# Altium PCB PCB1.PcbDoc
Units mil, origin at the board's own origin, x right, y up, seen from the top; angles counter-clockwise.
Board outline 2637.8 x 1692.91 mil, 2 copper layers (Top Layer, Bottom Layer); 41 components, 52 nets, 192 pads, 46 vias.
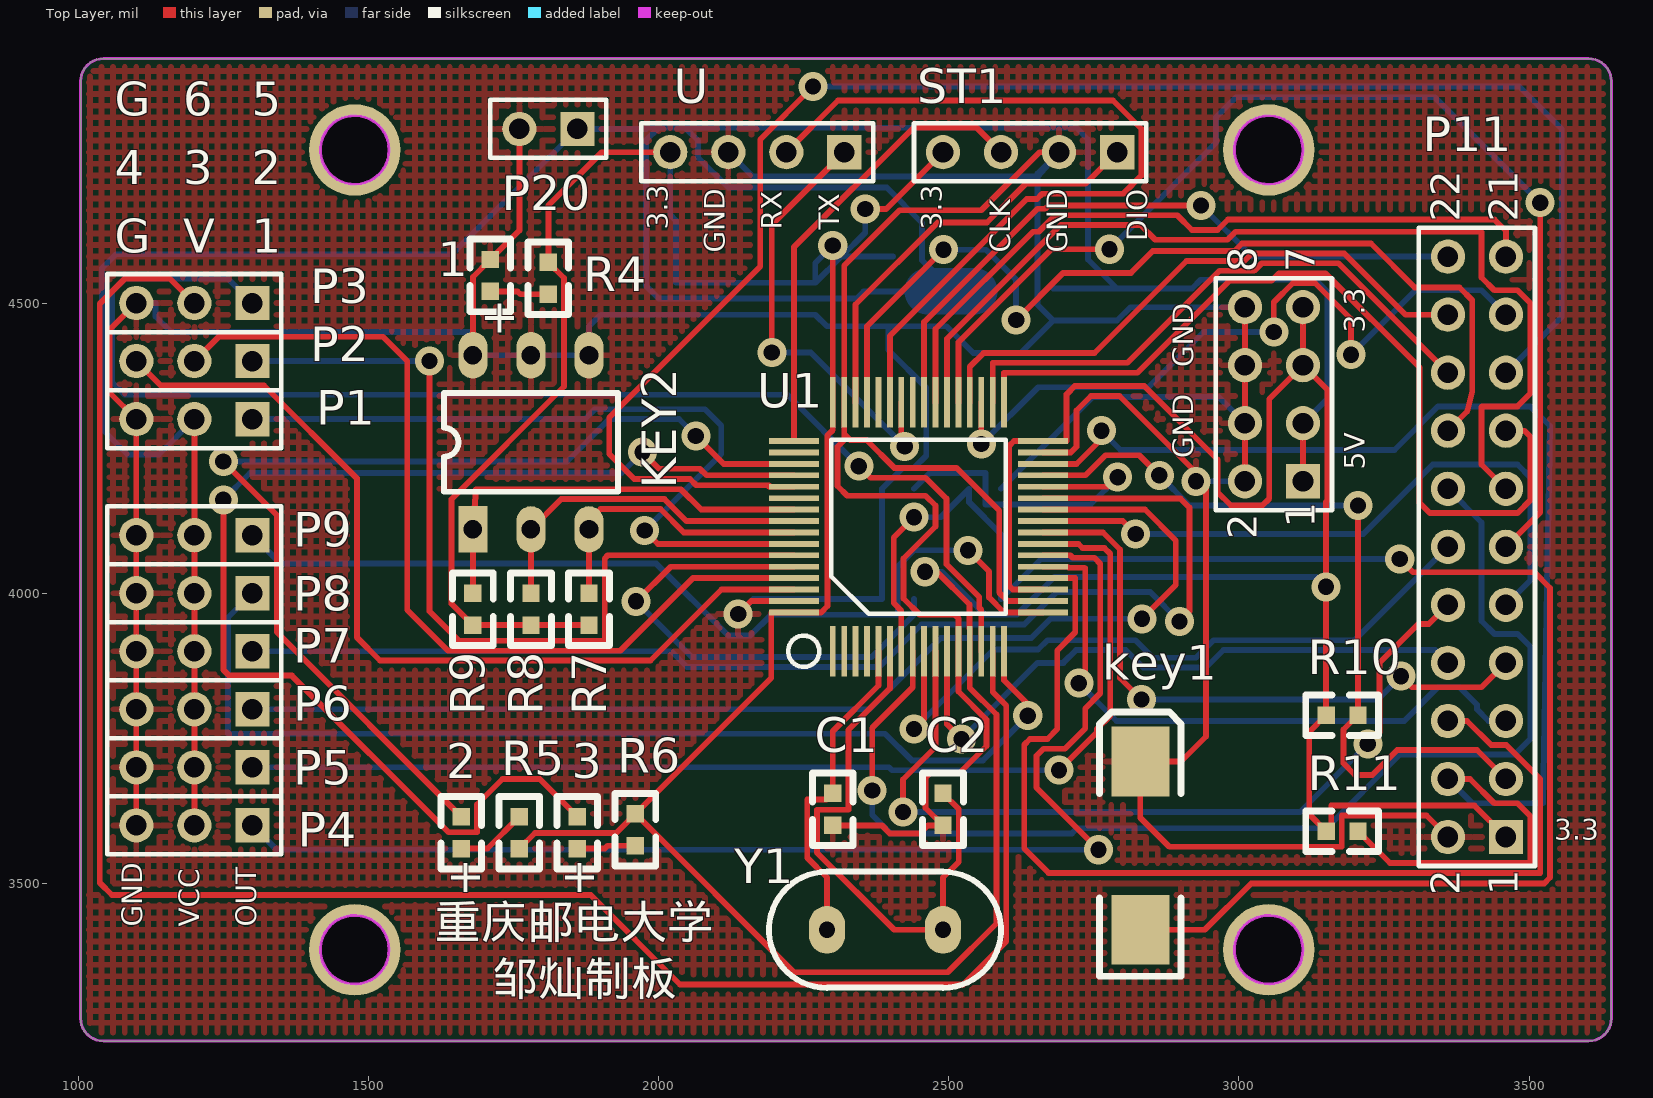
[diagram p0: Top Layer view]
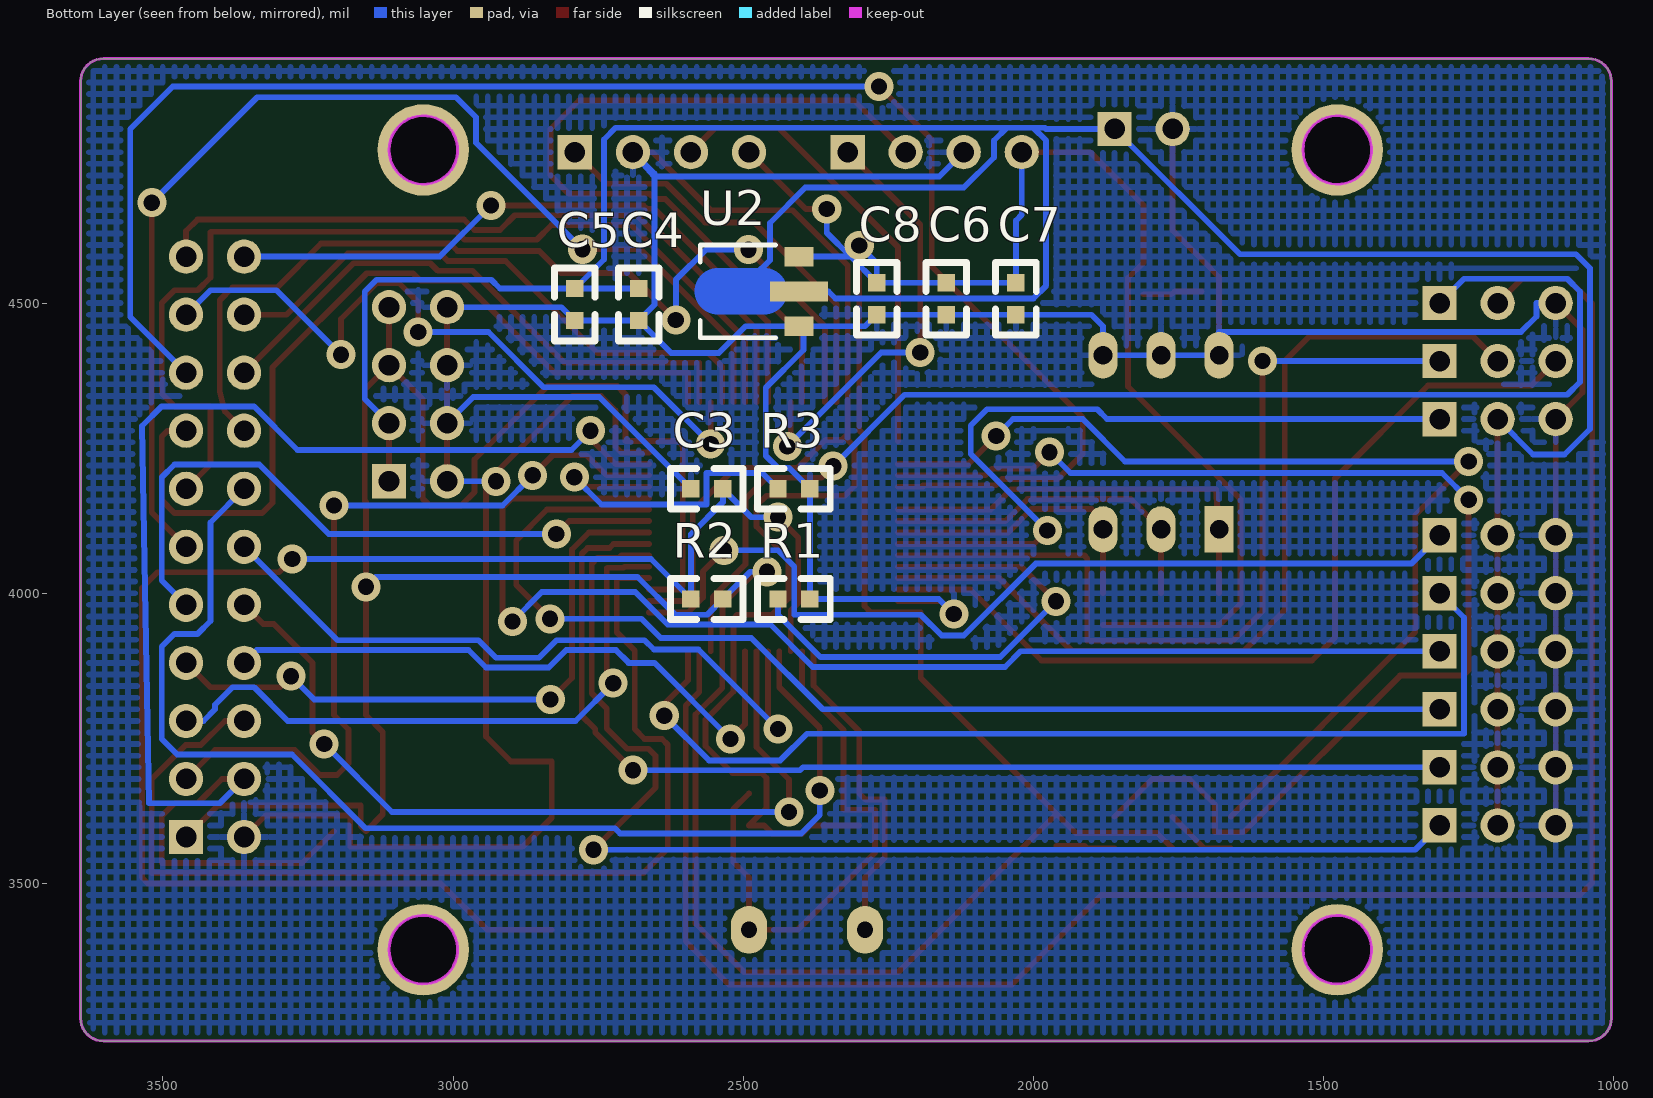
[diagram p1: Bottom Layer view, seen from below]

## Layer stack, top to bottom
Top Solder: solder mask 0.4, Solder Resist, Dk 3.5
Top Layer: signal copper 1.4
Dielectric 1: dielectric 12.6, FR-4, Dk 4.8
Bottom Layer: signal copper 1.4
Bottom Solder: solder mask 0.4, Solder Resist, Dk 3.5

## Board outline
1043.31,3228.35 cw(c1043.31,3267.72) 1003.94,3267.72 1003.94,4881.89 cw(c1043.31,4881.89) 1043.31,4921.26 3602.36,4921.26 cw(c3602.36,4881.89) 3641.73,4881.89 3641.73,3267.72 cw(c3602.36,3267.72) 3602.36,3228.35

## Design rules (kind name [scope] priority, off if disabled: settings)
Clearance [All] p1: gap=7
PolygonConnect [All] p1: connectstyle=Relief reliefconductorwidth=10 reliefentries=4 polygonreliefangle="90 Angle" airgapwidth=10
RoutingVias [All] p1: holewidth=28 width=50 viastyle="Through Hole" minholewidth=28 minwidth=50 maxholewidth=28 maxwidth=50
SolderMaskExpansion [All] p1: expansion=4
UnpouredPolygon [All] p1: allowunpoured=FALSE
Width [All] p1: maxlimit=10 minlimit=10 preferedwidth=10
29 further rules are at their usual default settings.

## Components (designator, comment, footprint, x,y, rotation, side; value= is the part's Value field where it differs from the comment)
1 "LED" 0603c 1710,4520 r90 top
2 "LED" 0603c 1660,3560 r90 top
3 "LED" 0603c 1860,3560 r90 top
C1 "cap" 0603c 2300,3600 r90 top
C2 "cap" 0603c 2490,3600 r90 top
C3 "cap" 0603c 2590,4180 r180 bottom
C4 "cap" 0603c 2680,4470 r90 bottom
C5 "cap" 0603c 2790,4470 r90 bottom
C6 "cap" 0603c 2150,4480 r90 bottom
C7 "cap" 0603c 2030,4480 r90 bottom
C8 "cap" 0603c 2270,4480 r90 bottom
key1 "KEY" 7243 2830,3710 r90 top
KEY2 "SW DIP-3" DIP6 1680,4110 r90 top
P1 "P-IN1" HDR1X3 1300,4300 r180 top
P2 "P-IN234" HDR1X3 1300,4400 r180 top
P3 "P-IN56" HDR1X3 1300,4500 r180 top
P4 "P-OUT1" HDR1X3 1300,3600 r180 top
P5 "P-OUT2" HDR1X3 1300,3700 r180 top
P6 "P-OUT3" HDR1X3 1300,3800 r180 top
P7 "P-OUT4" HDR1X3 1300,3900 r180 top
P8 "P-OUT5" HDR1X3 1300,4000 r180 top
P9 "P-OUT6" HDR1X3 1300,4100 r180 top
P10 "Header 4X2" HDR2X4 3110.24,4192.91 r90 top
P11 "OV7670-FIFO" HDR2X11 3460,3580 r90 top
P20 "Header 2" HDR1X2 1860,4800 r180 top
R1 "10K" 0603c 2440,3990 r180 bottom
R2 "10K" 0603c 2590,3990 r180 bottom
R3 "10K" 0603c 2440,4180 r180 bottom
R4 "1K" 0603c 1810,4570 r270 top
R5 "1K" 0603c 1760,3560 r90 top
R6 "1K" 0603c 1960,3620 r270 top
R7 "10K" 0603c 1880,4000 r270 top
R8 "10K" 0603c 1780,4000 r270 top
R9 "10K" 0603c 1680,4000 r270 top
R10 "RES" 0603c 3150,3790 r0 top
R11 "RES" 0603c 3150,3590 r0 top
ST1 "Header 4" HDR1X4 2790,4760 r180 top
U "Header 4" HDR1X4 2320,4760 r180 top (schematic designator ST2)
U1 "STM32F103RDT6" LQFP64 2300,3900 r90 top
U2 "XC6203E" SOT-89 2404,4460 r90 bottom
Y1 "5032xtal" XTAL 2390,3420 r180 top

## Footprints (in the part's own frame and the unit in brackets; to place one, negate y for a bottom-side part, rotate by r counter-clockwise, add the part's x,y. Pads: shape width x height; smd on the part's side, far side on the other; paste and mask are expansions set on the pad)
0603c [mil]
  rect 30x30 smd: 1(0,0) 2(55,0)
  silkscreen extent -35,-35 90,35
7243 [mil]
  rect 120x100 smd: 1(0,0) 2(-290,0)
  silkscreen extent -370,-70 85,70
DIP6 [mil]
  rect 80x50 hole 32: 1(0,0)
  oval 80x50 hole 32: 2(0,-100) 3(0,-200) 4(300,-200) 5(300,-100) 6(300,0)
  silkscreen extent 65,-250 235,50
HDR1X2 [mm] "Connector; Header; 2 Position"
  rect 1.5x1.5 hole 0.9: 1(0,0)
  round 1.5 hole 0.9: 2(2.54,0)
  silkscreen extent -1.27,-1.27 3.81,1.27
HDR1X3 [mm] "Connector; Header; 3 Position"
  rect 1.5x1.5 hole 0.9: 1(0,0)
  round 1.5 hole 0.9: 2(2.54,0) 3(5.08,0)
  silkscreen extent -1.27,-1.27 6.35,1.27
HDR1X4 [mm] "Connector; Header; 4 Position"
  rect 1.5x1.5 hole 0.9: 1(0,0)
  round 1.5 hole 0.9: 2(2.54,0) 3(5.08,0) 4(7.62,0)
  silkscreen extent -1.27,-1.27 8.89,1.27
HDR2X4 [mm] "Connector; Header; 4x2 Position"
  rect 1.5x1.5 hole 0.9: 1(0,0)
  round 1.5 hole 0.9: 2(0,2.54) 3(2.54,0) 4(2.54,2.54) 5(5.08,0) 6(5.08,2.54) 7(7.62,0) 8(7.62,2.54)
  silkscreen extent -1.27,-1.27 8.89,3.81
HDR2X11 [mm] "Connector; Header; 11x2 Position"
  rect 1.5x1.5 hole 0.9: 1(0,0)
  round 1.5 hole 0.9: 2(0,2.54) 3(2.54,0) 4(2.54,2.54) 5(5.08,0) 6(5.08,2.54) 7(7.62,0) 8(7.62,2.54) 9(10.16,0) 10(10.16,2.54) 11(12.7,0) 12(12.7,2.54) 13(15.24,0) 14(15.24,2.54) 15(17.78,0) 16(17.78,2.54) 17(20.32,0) 18(20.32,2.54) 19(22.86,0) 20(22.86,2.54) 21(25.4,0) 22(25.4,2.54)
  silkscreen extent -1.27,-1.27 26.67,3.81
LQFP64 [mm] "LQFP64"
  rect 2.2x0.254 smd: 1(0,0) 2(0,-0.5) 3(0,-1) 4(0,-1.5) 5(0,-2) 6(0,-2.5) 7(0,-3) 8(0,-3.5) 9(0,-4) 10(0,-4.5) 11(0,-5) 12(0,-5.5) 13(0,-6) 14(0,-6.5) 15(0,-7) 16(0,-7.5) 33(10.9,-7.5) 34(10.9,-7) 35(10.9,-6.5) 36(10.9,-6) 37(10.9,-5.5) 38(10.9,-5) 39(10.9,-4.5) 40(10.9,-4) 41(10.9,-3.5) 42(10.9,-3) 43(10.9,-2.5) 44(10.9,-2) 45(10.9,-1.5) 46(10.9,-1) 47(10.9,-0.5) 48(10.9,0)
  rect 0.254x2.2 smd: 17(1.7,-9.2) 18(2.2,-9.2) 19(2.7,-9.2) 20(3.2,-9.2) 21(3.7,-9.2) 22(4.2,-9.2) 23(4.7,-9.2) 24(5.2,-9.2) 25(5.7,-9.2) 26(6.2,-9.2) 27(6.7,-9.2) 28(7.2,-9.2) 29(7.7,-9.2) 30(8.2,-9.2) 31(8.7,-9.2) 32(9.2,-9.2) 49(9.2,1.7) 50(8.7,1.7) 51(8.2,1.7) 52(7.7,1.7) 53(7.2,1.7) 54(6.7,1.7) 55(6.2,1.7) 56(5.7,1.7) 57(5.2,1.7) 58(4.7,1.7) 59(4.2,1.7) 60(3.7,1.7) 61(3.2,1.7) 62(2.7,1.7) 63(2.2,1.7) 64(1.7,1.7)
  silkscreen extent -0.68,-7.56 9.27,1.95
SOT-89 [mil]
  rect 34x50 smd: 1(0,0) 3(120,0)
  rect 34x100 smd: 2(60,0)
  Top Layer lines w80: 60,60 60,140
  silkscreen extent -20,40 140,170
XTAL [mil]
  oval 62x82 hole 28: 1(-100,0) 2(100,0)
  silkscreen extent -200,-100 200,100

## Part data
KEY2: "DIP Switch"
P1 P2 P3 P4 P5 P6 P7 P8 P9: library part MHDR1X3, "Header, 3-Pin"
P10: "Header, 4-Pin, Dual row"
P11: library part "Header 11X2", "Header, 11-Pin, Dual row"
P20: "Header, 2-Pin"
R1 R2 R3 R4 R5 R6 R7 R8 R9: library part RES
ST1 U: "Header, 4-Pin"
U2: library part XC6203

## Free pads (board coordinates)
  round 157.48 hole 118.11: 0(1476.38,3385.83) 1(3051.18,3385.83) 2(3051.18,4763.78) 3(1476.38,4763.78)

## Via types
v1: diameter 50, hole 28, Top Layer to Bottom Layer, 46 vias

## Nets (pads, with @x,y where several pads share a name; then routed paths per layer and width w, separated by ;. In a path a pad name is that pad's centre, name@x,y a point inside that pad or via, vN(x,y) a via of type N, cw(c..) or ccw(c..) an arc to the next point about the centre after c; other vN are vias at no path point)
D0: P11.14 U1.8 | length 2038.9
  Top Layer w10: v1(2368,3660) 2368,3768 2437.8,3837.8 U1.8
  Bottom Layer w10: v1(2368,3660) 2368,3618 2400,3586 2712,3586 2721,3595 3150.64,3595 3277.64,3722 3475,3722 3502,3749 3502,3908 3480,3930 3440,3930 3418,3952 3418,4122 P11.14
D1: P11.12 U1.9 | length 1216.3
  Top Layer w10: v1(2440,3766) 2457.48,3783.48 U1.9
  Bottom Layer w10: v1(2440,3766) 2577,3903 2653.87,3903 2669.87,3919 2821.85,3919 2852,3888.85 2926,3888.85 2956.15,3919 3199,3919 P11.12
D2: P11.10 U1.10 | length 1457.4
  Top Layer w10: v1(2421,3623) 2421,3678.83 2477.17,3735 U1.10 ; v1(3222,3740) 3242,3760 3242,3880 3309,3947 3327,3947 P11.10
  Bottom Layer w10: v1(2421,3623) 3105,3623 v1(3222,3740)
D3: P11.8 U1.11 | length 1096.9
  Top Layer w10: U1.11 2496.85,3774.15 v1(2522,3749)
  Bottom Layer w10: v1(2522,3749) 2653,3880 2697.37,3880 2719.37,3902 2804.85,3902 2835,3871.85 2943,3871.85 2973.15,3902 3338,3902 P11.8
D4: P11.7 U1.24 | length 1088.5
  Top Layer w10: U1.24 2765.63,4104.72 2795,4075.35 2795,3854 v1(2832,3817) ; v1(3279,3857) 3298,3838 3418,3838 P11.7
  Bottom Layer w10: v1(2832,3817) 3239,3817 v1(3279,3857)
D5: P11.9 U1.25 | length 1145.3
  Top Layer w10: U1.25 2799.59,4124.41 v1(2822,4102)
  Bottom Layer w10: v1(2822,4102) 3214,4102 3334,4222 3480,4222 3502,4200 3502,4022 P11.9
D6: P11.11 U1.37 | length 1998.9
  Top Layer w10: U1.37 2516.54,4432.34 2676.88,4592.69 v1(2777,4592.69) ; P11.11 3519,4139 v1(3519,4673)
  Bottom Layer w10: v1(2777,4592.69) 2960.44,4776.13 2960.44,4820 2994.96,4854.52 3337.48,4854.52 v1(3519,4673)
D7: P11.13 U1.38 | length 1716.4
  Top Layer w10: U1.38 2496.85,4438.4 2692.75,4634.29 2830.28,4634.29 2855.57,4609 2980,4609 2994,4623 3417,4623 3418,4622 3418,4544 3440,4522 3480,4522 3502,4500 3502,4344 3480,4322 3419,4322 3418,4321 3418,4222 P11.13
FIFO_OE: P11.20 U1.36 | length 1009.4
  Top Layer w10: U1.36 2536.22,4390.22 2560,4414 2751.17,4414 2909.68,4572.51 3009.1,4572.51 3022.03,4585.44 3181.52,4585.44 3286.96,4480 P11.20
FIFO_RCK: P11.18 U1.34 | length 1001.3
  Top Layer w10: U1.34 2575.59,4397 2808,4397 2966.51,4555.51 3026.1,4555.51 3039.03,4568.44 3171.56,4568.44 P11.18
FIFO_RRST: P11.22 U1.40 | length 1160.4
  Top Layer w10: U1.40 2457.48,4467.14 2652.71,4662.36 2665.97,4662.36 2671.9,4668.29 v1(2934.71,4668.29)
  Bottom Layer w10: v1(2934.71,4668.29) 3023,4580 P11.22
FIFO_WR: P11.19 U1.35 | length 1271.8
  Top Layer w10: v1(2555.91,4257) U1.35 ; v1(3060,4450) 3060,4501.41 3093.03,4534.44 3131,4534.44 3193,4472.44 v1(3193,4411)
  Bottom Layer w10: v1(2555.91,4257) 2653.91,4355 2844,4355 2939,4450 v1(3060,4450) ; v1(3193,4411) 3304,4522 3418,4522 P11.19
FIFO_WRST: P11.21 U1.39 | length 1260.3
  Top Layer w10: U1.39 2477.17,4455.17 2645,4623 2655,4623 2683.29,4651.29 2893.71,4651.29 2919,4626 2963,4626 2981,4644 3440,4644 3460,4624 P11.21
GND: 1.2 C1.1 C2.1 C3.1 C4.1 C5.1 C6.1 C7.1 C8.1 key1.1 KEY2.4 KEY2.5 KEY2.6 P1.3 P3.3 P4.3 P5.3 P6.3 P7.3 P8.3 P9.3 P10.2 P10.4 P10.6 P10.8 P11.2 P20.2 R1.2 R3.2 ST1.2 U1.12 U1.18 U1.31 U1.47 U1.63 U2.1 U.3 | length 10413.6
  Top Layer w10: P4.3 P5.3 P6.3 P7.3 P8.3 P9.3 P1.3 1054,4346 1054,4454 P3.3 ; KEY2.6 1680,4545 1.2 1760,4625 P20.2 ; v1(2137,3964) 2159.61,3986.61 U1.63 ; C1.1 2384.27,3600 2398.27,3586 2450,3586 2464,3600 C2.1 2460,3630 2460,3681.66 2468.61,3690.27 2518.61,3690.27 2565,3736.66 2565,3782.01 2516.54,3830.47 U1.12 2516.54,3956.42 2510.18,3962.78 2449.97,3962.78 2422,3990.75 2422,4060 2477,4115 2477,4151 2460,4168 2324.97,4168 2308,4184.97 2308,4252.31 2319.69,4264 2319.69,4274.31 ; U1.18 2601.39,3986.61 2587,4001 2587,4142.34 2513.34,4216 2406,4216 2358,4264 2330,4264 2319.69,4274.31 ; U1.31 2710,4242.52 2720.01,4252.53 2720.01,4315.01 2745,4340 2794,4340 v1@2933.54,4200.46 ; ST1.2 2656.08,4760 2556.08,4660 2415,4660 2319.69,4564.69 U1.47 2319.69,4274.31 ; v1(2926,4192.91) v1@2933.54,4200.46 ; P10.2 P10.4 P10.6 P10.8 ; P11.2 3323,3617 3177,3617 3177,3563 2880,3563 2830,3613 key1.1 2900,3710 2943,3753 2943,4191 v1@2933.54,4200.46
  Bottom Layer w10: P3.3 1133,4500 1133,4477 1160,4450 1680,4450 KEY2.6 KEY2.5 KEY2.4 1880,4460 1900,4480 C7.1 C6.1 C8.1 2290,4460 U2.1@2396,4460 ; U.3 2162,4718 2653,4718 ; v1(2137,3964) 2163,3990 R1.2 R3.2 2421,4216 2440,4216 2461,4237 2461,4354 2396,4419 U2.1@2396,4460 ; C3.1 2748,4338 2965.15,4338 P10.4 ; v1(2926,4192.91) P10.2 ; P10.8 2812.91,4492.91 C5.1 C4.1 ; U2.1@2396,4460 U2.1 2496,4460 2542,4414 2624,4414 C4.1 ; 2653,4718 2653,4723 ST1.2 2653,4718 ; 2653,4718 2653,4497 C4.1
HERF: P11.6 U1.20 | length 1844.6
  Top Layer w10: U1.20 2718,4025.98 2718,3932.65 2686.87,3901.52 2686.87,3765.87 2670,3749 2640,3749 2630,3739 2630,3560 2672,3518 3519,3518 3519,3680 3460.53,3738.47 3434.53,3738.47 3393,3780 P11.6
I2C2_SCL: P11.3 R10.2 U1.29 | length 1374.2
  Top Layer w10: U1.29 2735.37,4203.15 2770,4237.78 2828.01,4237.78 v1(2862.64,4203.15) ; v1(3205,4151) R10.2 3180,3765 3180,3707 3200,3687 3229.67,3687 3272.67,3730 3410,3730 P11.3
  Bottom Layer w10: v1(2862.64,4203.15) 2914.79,4151 v1(3205,4151)
I2C2_SDA: P11.4 R11.2 U1.30 | length 2365.4
  Top Layer w10: U1.30 2720,4222.83 2763,4265.83 v1(2763,4280) ; R11.2 3260,3535 3502,3535 3502,3616 3480,3638 3440,3638 3398,3680 P11.4
  Bottom Layer w10: v1(2763,4280) 2796,4247 3268,4247 3343,4322 3502,4322 3536,4288 3524,3638 3402,3638 P11.4
KEY1: KEY2.1 R9.1 U1.55 | length 741.9
  Top Layer w10: R9.1 KEY2.1 1685.3,4179.3 2038.15,4179.3 2073.36,4144.09 U1.55
KEY2: KEY2.2 R8.1 U1.56 | length 600.4
  Top Layer w10: R8.1 KEY2.2 1832.3,4162.3 2009.85,4162.3 2047.75,4124.41 U1.56
KEY3: KEY2.3 R7.1 U1.57 | length 503
  Top Layer w10: R7.1 KEY2.3 1880,4125 1900,4145 2003.01,4145 2043.28,4104.72 U1.57
LED1: 2.2 U1.51 | length 1827.1
  Top Layer w10: v1(1250,4227) 1342,4135 1342,3933 2.2 ; v1(2064,4271) 2112.17,4222.83 U1.51
  Bottom Layer w10: v1(1250,4227) 1842,4227 1915,4300 2035,4300 v1(2064,4271)
LED2: 3.2 U1.52 | length 2145.7
  Top Layer w10: v1(1250,4161) 1250,3868 1260,3858 1368,3858 1638,3588 1687,3588 1687,3636 1731,3680 1795,3680 3.2 ; v1(1972,4243) 2000.55,4214.45 2071.01,4214.45 2082.31,4203.15 U1.52
  Bottom Layer w10: v1(1250,4161) 1296,4207 1936,4207 v1(1972,4243)
Net1_A: 1.1 R4.2 | length 102.1
  Top Layer w10: 1.1 1757,4520 1762,4515 R4.2
Net2_A: 2.1 R5.2 | length 122.8
  Top Layer w10: 2.1 1705,3560 R5.2
Net3_A: 3.1 R6.2 | length 102.1
  Top Layer w10: 3.1 1907,3560 1912,3565 R6.2
NetC1_2: C1.2 U1.5 Y1.2 | length 564.5
  Top Layer w10: Y1.2 2290,3510 2256,3544 2256,3644.49 2289.49,3644.49 C1.2 2300,3762.26 2378.74,3841 U1.5
NetC2_2: C2.2 U1.6 Y1.1 | length 960
  Top Layer w10: U1.6 2398.43,3836 2327,3764.57 2327,3627 2273,3627 2273,3553 2406,3420 Y1.1 2490,3510 2517,3537 2517,3628 C2.2
NetR1_1: R1.1 U1.60 | length 872.8
  Top Layer w10: v1(1961,3986) 2020.67,4045.67 U1.60
  Bottom Layer w10: v1(1961,3986) 2057,3890 2367,3890 2440,3963 R1.1
NetR3_1: R3.1 U1.28 | length 571.3
  Top Layer w10: U1.28 2774.46,4183.46 v1(2791,4200)
  Bottom Layer w10: R3.1 2467,4207 2563,4207 2563,4153 2744,4153 v1(2791,4200)
P-IN1: P1.1 U1.58 | length 1328.9
  Top Layer w10: v1(1976,4108) 1998.96,4085.04 U1.58
  Bottom Layer w10: P1.1 1873,4300 1890,4317 2080,4317 2108,4289 2108,4240 v1(1976,4108)
P-IN2: P2.1 U1.59 | length 1529.4
  Top Layer w10: v1(1605,4400) 1605,3969 1656,3918 1907,3918 1907,4060 1912.35,4065.35 U1.59
  Bottom Layer w10: P2.1 v1(1605,4400)
P-IN3: P2.2 U1.61 | length 1577.6
  Top Layer w10: P2.2 1242,4442 1525,4442 1567,4400 1567,3971 1637,3901 1934,3901 2058.98,4025.98 U1.61
P-IN4: P2.3 U1.62 | length 1558
  Top Layer w10: P2.3 1142,4358 1320,4358 1480,4198 1480,3924 1520,3884 1985.98,3884 2108.28,4006.3 U1.62
P-IN5: P3.1 U1.14 | length 2233.6
  Top Layer w10: v1(2345,4219) 2365,4199 2460,4199 2496,4163 2496,4050 2552.45,3993.55 2552.45,3975.03 2555.91,3971.57 U1.14
  Bottom Layer w10: P3.1 1258,4542 1080,4542 1058,4520 1058,4364 1080,4342 2222,4342 v1(2345,4219)
P-IN6: P3.2 U1.15 | length 3371
  Top Layer w10: P3.2 1158,4542 1080,4542 1037,4499 1037,3501 1058,3480 1883,3480 2037,3326 2525,3326 2599,3400 2599,3806.59 2575.59,3830 U1.15
P-OUT1: P4.1 U1.22 | length 2184.7
  Top Layer w10: U1.22 2709.17,4065.35 2713.54,4060.99 2751,4060.99 2761,4050.98 2761,3827.52 2735,3801.52 2735,3767 2700,3732 2663,3732 2651,3720 2651,3665 v1(2758,3558)
  Bottom Layer w10: P4.1 1342,3558 v1(2758,3558)
P-OUT2: P5.1 U1.23 | length 1924.4
  Top Layer w10: U1.23 2723.49,4085.04 2730.54,4077.99 2768,4077.99 2778,4067.98 2778,3789 2755,3766 2755,3760 v1(2690,3695)
  Bottom Layer w10: P5.1 2397,3700 2402,3695 v1(2690,3695)
P-OUT3: P6.1 U1.26 | length 2007.4
  Top Layer w10: U1.26 2837.91,4144.09 2891,4091 2891,4014 v1(2833,3956)
  Bottom Layer w10: P6.1 2363,3800 2486,3923 2642,3923 2675,3956 v1(2833,3956)
P-OUT4: P7.1 U1.27 | length 2145.1
  Top Layer w10: U1.27 2753.22,4163.78 2754,4163 2899,4163 2914.5,4147.5 2914.5,3968.5 v1(2897.5,3951.5)
  Bottom Layer w10: P7.1 2022,3900 2049,3873 2380.04,3873 2453.04,3946 2630,3946 2686,4002 2847,4002 v1(2897.5,3951.5)
P-OUT5: P8.1 U1.16 | length 1816.2
  Top Layer w10: U1.16 2595.28,3850 2636,3809.28 v1(2636,3789)
  Bottom Layer w10: P8.1 1258,3958 1258,3758 2390,3758 2436,3712 2559,3712 v1(2636,3789)
P-OUT6: P9.1 U1.17 | length 1614
  Top Layer w10: v1(2533,4074) 2569.45,4037.55 2569.45,3992.67 2595.19,3966.93 U1.17
  Bottom Layer w10: P9.1 1349,4051 1996,4051 2120,3927 2158,3927 2194,3963 2412,3963 2412,4046 2440,4074 v1(2533,4074)
PWDN: P11.16 U1.45 | length 1653.7
  Top Layer w10: U1.45 2359.06,4460.06 v1(2491,4592) ; v1(2616,4471) 2697,4552 2814,4552 2851.51,4589.51 2992.1,4589.51 3005.03,4602.44 3227.56,4602.44 3303,4527 3380,4527 3402,4505 3402,4347.53 3393,4313 P11.16
  Bottom Layer w10: v1(2491,4592) 2564,4592 2616,4540 v1(2616,4471)
RESET: P11.15 U1.33 | length 1501.7
  Top Layer w10: U1.33 2595.28,4380 2825,4380 2983.51,4538.51 3056.03,4538.51 3068.97,4551.44 3148.76,4551.44 3311,4389.21 3311,4156 3329,4138 3480,4138 3502,4160 3502,4270 3492,4280 P11.15
RST: C3.2 key1.2 R2.1 U1.7 | length 2816.6
  Top Layer w10: U1.7 2418.11,3969.89 2405,3983 2405,4096 v1(2440,4131) ; key1.2 2941,3420 3021,3500 3526,3500 3536,3510 3536,4009 3509,4036 3300,4036 v1(3277,4059)
  Bottom Layer w10: v1(2440,4131) 2486,4131 C3.2 2535,4156.66 2590,4101.66 R2.1 2659,4059 v1(3277,4059)
STROBE: P11.17 U1.53 | length 2901.5
  Top Layer w10: U1.53 2190,4183.46 2190,4186.15 2064.85,4186.15 2054,4197 1958,4197 1915,4240 1915,4303 2175,4563 2175,4782 v1(2266,4873)
  Bottom Layer w10: v1(2266,4873) 3483,4873 3556,4800 3556,4476 P11.17
SWCLK: ST1.3 U1.49 | length 793.6
  Top Layer w10: U1.49 2233,4262.2 2233,4596 2439,4802 2548,4802 ST1.3
SWDIO: ST1.1 U1.46 | length 727.7
  Top Layer w10: U1.46 2339.37,4497.37 2480.91,4638.91 2565.94,4638.91 2632.52,4705.5 2735.5,4705.5 ST1.1
U1_RX: U1.43 U.2 | length 1411.6
  Top Layer w10: U.2 2309,4849 2783,4849 2832,4800 2832,4720 2800.5,4688.5 2661,4688.5 2651.86,4679.36 2634.4,4679.36 2398.43,4443.39 U1.43
U1_TX: U1.42 U.1 | length 771.5
  Top Layer w10: v1(2195,4415) 2195,4635 U.1 ; U1.42 2418.11,4258.89 v1(2424,4253)
  Bottom Layer w10: v1(2195,4415) 2262,4415 v1(2424,4253)
VCC-3: C6.2 C7.2 C8.2 P10.5 P10.7 P11.1 R2.2 R4.1 R5.1 R6.1 R7.2 R8.2 R9.2 R10.1 R11.1 ST1.4 U1.13 U1.19 U1.32 U1.48 U1.64 U2.3 U.4 | length 8372.7
  Top Layer w10: R5.1 1787,3587 1927,3587 R6.1 ; R7.2 R8.2 R9.2 1643,3982 1643,4162 1837,4356 1837,4543 R4.1 1810,4668 1902,4760 U.4 ; v1(2300,4599) U1.48 2300,4281 2291,4272 2291,3977.93 2280,3966.93 U1.64 2194,3966.93 2194,3854 R6.1 ; v1(2356,4662) 2392,4662 ST1.4 ; v1(2459,4037) 2479,4037 2535.45,3980.55 2535.45,3939.07 2536.22,3938.3 U1.13 2536.22,3836.78 2582,3791 2582,3431 2498,3347 2233,3347 R6.1 ; U1.19 2610,4006.3 2604.1,4012.2 2604.1,4254.1 2612.2,4262.2 U1.32 2703.01,4262.2 2703.01,4342.87 2717.14,4357 2836.58,4357 2963,4230.58 2963,4174.16 2986.16,4151 3040,4151 3052,4163 3052,4334.68 P10.5 ; P10.7 P10.5 ; P11.1 3406,3634 3159.02,3634 3159.02,3599.02 R11.1 3121,3619 3121,3761 R10.1 v1(3150,4011) 3150,4157 3152,4159 3152,4351.15 P10.5
  Bottom Layer w10: U.4 2020,4652 2030,4642 C7.2 C6.2 C8.2 ; v1(2300,4599) 2270,4569 C8.2 ; v1(2356,4662) 2356,4621 v1@2315,4580 ; U2.3 v1@2315,4580 ; v1(2459,4037) 2488,4037 R2.2 2562,3963 2617,3963 2682,4028 3133,4028 v1(3150,4011) ; C8.2 v1@2315,4580
VCC-5: C4.2 C5.2 P1.2 P4.2 P5.2 P6.2 P7.2 P8.2 P9.2 P10.1 P10.3 P20.1 U2.2 | length 5546.2
  Top Layer w10: P4.2 P5.2 P6.2 P7.2 P8.2 P9.2 P1.2 ; P10.1 P10.3
  Bottom Layer w10: P1.2 1139,4239 1085,4239 1041,4283 1041,4560 1065,4584 1644,4584 P20.1 1978,4800 1980,4802 2000,4802 ; 2464,4520 U2.2 2353,4520 2341,4508 2000,4508 1978,4530 1978,4780 2000,4802 ; 2544,4520 2516.17,4547.83 2480,4547.83 2454,4573.83 2454,4638.06 2393.06,4699 2120,4699 2068,4751 2068,4780 2046,4802 ; C4.2 C5.2 ; P10.3 3152,4334.68 3152,4520 3132,4540 2934,4540 2919,4525 C5.2 ; 2000,4802 2046,4802 ; 2046,4802 2720,4802 2740,4782 2740,4575 C5.2
VSYNC: P11.5 U1.21 | length 1092.1
  Top Layer w10: U1.21 2704.52,4045.67 2706.21,4043.99 2734,4043.99 2735,4042.98 2735,3856 v1(2724,3845)
  Bottom Layer w10: v1(2724,3845) 2789,3780 3284.67,3780 3342.67,3838 3380,3838 3410,3808 3410,3800 3430,3780 P11.5
pads on no net: U1.1 U1.2 U1.3 U1.4 U1.41 U1.44 U1.50 U1.54

## Polygon pours and split planes (outlines as drawn)
GND on Top Layer "Top Layer-No Net" (hatched 90Degree grid 20 track 10, remove dead copper, pour order 2): 944.88,4960.63 905.51,4921.26 905.51,2992.13 3897.64,2992.13 3976.38,3070.87 3877.95,3169.29 3877.95,5000
GND on Bottom Layer "Top Layer-No Net" (hatched 90Degree grid 20 track 10, remove dead copper, pour order 4): 846.46,5000 846.46,3070.87 807.09,3031.5 866.14,3090.55 3877.95,3090.55 3877.95,4921.26 3799.21,5000

## Keep-outs
Keep-Out Layer:
  circle w5: c1476.38,4763.78 r59.06
  circle w5: c3051.18,4763.78 r59.06
  circle w5: c3051.18,3385.83 r59.06
  circle w5: c1476.38,3385.83 r59.06
  lines w5: 1082.68,3228.35 1043.31,3228.35 ; 1003.94,4881.89 cw(c1043.31,4881.89) 1043.31,4921.26 3602.36,4921.26 ; 1003.94,4881.89 1003.94,3267.72 ccw(c1043.31,3267.72) 1043.31,3228.35 ; 1003.94,4881.89 1003.94,4881.89 ; 1043.31,3228.35 1043.31,3228.35 ; 1043.31,3228.35 1950,3228.35 2550,3228.35 3602.36,3228.35 ccw(c3602.36,3267.72) 3641.73,3267.72 ; 3602.36,4921.26 cw(c3602.36,4881.89) 3641.73,4881.89 3641.73,3267.72 ; 3602.36,4921.26 3602.36,4921.26 ; 3641.73,3267.72 3641.73,3267.72

## Silkscreen, mask and mechanical layers (free items; w line width, h text height)
Top Overlay:
  text "G" at 1062.99,4803.15 h100
  text "6" at 1181.1,4803.15 h100
  text "5" at 1299.21,4803.15 h100
  text "4" at 1062.99,4685.04 h100
  text "3" at 1181.1,4685.04 h100
  text "2" at 1299.21,4685.04 h100
  text "3.3" at 2027.56,4625.98 h60 r90
  text "RX" at 2224.41,4625.98 h60 r90
  text "TX" at 2322.83,4625.98 h60 r90
  text "3.3" at 2500,4625.98 h60 r90
  text "DIO" at 2854.33,4606.3 h60 r90
  text "GND" at 2125.98,4586.61 h60 r90
  text "CLK" at 2618.11,4586.61 h60 r90
  text "GND" at 2716.54,4586.61 h60 r90
  text "G" at 1062.99,4566.93 h100
  text "V" at 1181.1,4566.93 h100
  text "1" at 1299.21,4566.93 h100
  text "3.3" at 3228.35,4448.82 h60 r90
  text "+" at 1692.91,4429.13 h100
  text "GND" at 2933.07,4389.76 h60 r90
  text "GND" at 2933.07,4232.28 h60 r90
  text "5V" at 3228.35,4212.6 h60 r90
  text "3.3" at 3543.31,3562.99 h60
  text "+" at 1633.86,3464.57 h100
  text "+" at 1830.71,3464.57 h100
  text "GND" at 1122.05,3425.2 h60 r90
  text "VCC" at 1220.47,3425.2 h60 r90
  text "OUT" at 1318.9,3425.2 h60 r90
  text "重庆邮电大学" at 1614.17,3385.83 h100
  text "邹灿制板" at 1712.6,3287.4 h100

## Text inside footprints (layer, text, board x,y; h text height)
P10: Top Overlay "2" at 3030.24,4092.91 h50 r90; Top Overlay "1" at 3130.24,4112.91 h50 r90; Top Overlay "7" at 3130.24,4552.91 h50 r90; Top Overlay "8" at 3030.24,4552.91 h50 r90
P11: Top Overlay "22" at 3380,4640 h50 r90; Top Overlay "21" at 3480,4640 h50 r90; Top Overlay "2" at 3380,3480 h50 r90; Top Overlay "1" at 3480,3480 h50 r90